# EAGLE board Copy of Exemplo do CP1 - 2TDSP (1) (EAGLE 9.7.0)

Size 248.24 x 59.69 mm. Coordinates in mm from the lower left corner, seen from the top.
Outline: 0,0 248.24,0 248.24,59.69 0,59.69 0,0
Copper layers (1*16): Top 0.035mm / dielectric 1.5mm / Bottom 0.035mm
Design rules "default": minimum track width 6mil, minimum drill 0.35mm, track to track 6mil, track to pad 6mil, pad to pad 6mil, via to via 6mil, smd to smd 6mil, copper to edge 40mil, drill to drill 6mil, minimum pad ring 10mil, minimum via ring 8mil, stop-mask expansion 4mil, vias tented up to drill 0mil, thermal gap 10mil

## Footprints (pad centres in the part's own frame; a part is rotated, then mirrored left to right if it is on the bottom)
LEDRD254W60D565H860B_G = drill 0.981 pad 1.581: 1 -1.27,0; 2 1.27,0
LEDRD254W60D565H860B_Y = drill 0.981 pad 1.581: 1 -1.27,0; 2 1.27,0
LEDRD254W60D565H860B = drill 0.981 pad 1.581: 1 -1.27,0; 2 1.27,0
RESAD1016W63L850D250B = drill 0.83 pad 1.43: 1 -5.08,0; 2 5.08,0
HA-06-SM065 = drill 1 pad 1.676: 1 -2.54,-2.54; 2 0,2.54; 3 2.54,-2.54
SWITCH-MOMENTARY-PTH-6.5MM = drill 1.016 pad 1.88: 1 -3.251,2.261; 2 3.251,2.261; 3 -3.251,-2.261; 4 3.251,-2.261
ARDUINO-UNO-R3-SHIELD = drill 1.016 pad 1.88: 3.3V 24.13,-2.54; 5V 24.13,0; A0 24.13,12.7; A1 24.13,15.24; A2 24.13,17.78; A3 24.13,20.32; A4 24.13,22.86; A5 24.13,25.4; AREF -24.13,-13.97; D2 -24.13,20.32; D3 -24.13,17.78; D4 -24.13,15.24; D5 -24.13,12.7; D6 -24.13,10.16; D7 -24.13,7.62; D8 -24.13,3.81; D9 -24.13,1.27; D10 -24.13,-1.27; D11 -24.13,-3.81; D12 -24.13,-6.35; D13 -24.13,-8.89; GND@0 24.13,2.54; GND@1 24.13,5.08; GND@2 -24.13,-11.43; IOREF 24.13,-7.62; NC 24.13,-10.16; RES 24.13,-5.08; RX -24.13,25.4; SCL -24.13,-19.05; SDA -24.13,-16.51; TX -24.13,22.86; VIN 24.13,7.62

## Placement (x,y rotation side)
D1  GREEN  [LEDRD254W60D565H860B_G]  176.42,43.5 180 top
D2  YELLOW  [LEDRD254W60D565H860B_Y]  158.64,43.5 180 top
D3  RED  [LEDRD254W60D565H860B]  140.86,43.5 180 top
D6  RED  [LEDRD254W60D565H860B]  204.36,43.5 180 top
D7  GREEN  [LEDRD254W60D565H860B_G]  222.14,43.5 180 top
R1  150  [RESAD1016W63L850D250B]  182.77,40.96 0 top
R2  150  [RESAD1016W63L850D250B]  164.99,40.96 0 top
R3  150  [RESAD1016W63L850D250B]  147.21,40.96 0 top
R4  10k  [RESAD1016W63L850D250B]  124.35,13.02 90 top
R5  10k  [RESAD1016W63L850D250B]  114.19,13.02 90 top
R6  10k  [RESAD1016W63L850D250B]  134.51,13.02 90 top
R8  10k  [RESAD1016W63L850D250B]  104.03,13.02 90 top
R9  150  [RESAD1016W63L850D250B]  210.71,40.96 0 top
R10  150  [RESAD1016W63L850D250B]  228.49,40.96 0 top
RPOT3  250k  [HA-06-SM065]  241.19,23.18 0 top
S1  SWITCH_MOMENTARY  [SWITCH-MOMENTARY-PTH-6.5MM]  111.65,29.53 90 top
S2  SWITCH_MOMENTARY  [SWITCH-MOMENTARY-PTH-6.5MM]  121.81,29.53 90 top
S3  SWITCH_MOMENTARY  [SWITCH-MOMENTARY-PTH-6.5MM]  131.97,29.53 90 top
S5  SWITCH_MOMENTARY  [SWITCH-MOMENTARY-PTH-6.5MM]  101.49,29.53 90 top
U1  ARDUINO-UNO-R3-SHIELD  [ARDUINO-UNO-R3-SHIELD]  47.88,29.84 270 top

## Library data of the parts
D1 D7 = Tinkercad; CATEGORY: Opto-Electronic; SUB-CATEGORY: LED; VALUE: LED_GREEN
D2 = Tinkercad; CATEGORY: Opto-Electronic; SUB-CATEGORY: LED; VALUE: LED_YELLOW
D3 D6 = Tinkercad; CATEGORY: Opto-Electronic; SUB-CATEGORY: LED; VALUE: LED_RED
R1-R6 R8-R10 RPOT3 S1-S3 S5 U1 = Tinkercad

## Nets
D1_A: D1.1 R1.1
D2_A: D2.1 R2.1
D3_A: D3.1 R3.1
D6_A: D6.1 R9.1
D7_A: D7.1 R10.1
S1_3: R5.2 S1.3 S1.4
S2_3: R4.2 S2.3 S2.4
S3_3: R6.2 S3.3 S3.4
S5_4: R8.2 S5.3 S5.4
U1_A2: RPOT3.2 U1.A2
U1_D2: R3.2 U1.D2
U1_D3: R2.2 U1.D3
U1_D4: R1.2 U1.D4
U1_D5: R9.2 U1.D5
U1_D6: R10.2 U1.D6
U1_D10: RPOT3.3 S1.1 S1.2 S2.1 S2.2 S3.1 S3.2 S5.1 S5.2 U1.5V U1.D7 U1.D8 U1.D9 U1.D10
U1_GND: D1.2 D2.2 D3.2 D6.2 D7.2 R4.1 R5.1 R6.1 R8.1 RPOT3.1 U1.GND@0 U1.GND@1 U1.GND@2

## Tracks (layer width: path | path; a pad name or v marks a point on that pad's centre or on a via)
D1_A  (1 unrouted)
D2_A  (1 unrouted)
D3_A  (1 unrouted)
D6_A  (1 unrouted)
D7_A  (1 unrouted)
S1_3  (2 unrouted)
S2_3  (2 unrouted)
S3_3  (2 unrouted)
S5_4  (2 unrouted)
U1_A2  (1 unrouted)
U1_D2  (1 unrouted)
U1_D3  (1 unrouted)
U1_D4  (1 unrouted)
U1_D5  (1 unrouted)
U1_D6  (1 unrouted)
U1_D10  (13 unrouted)
U1_GND  (12 unrouted)